# Altium PCB AudioAmplifierBasic.PcbDoc (part 1 of 2)
Units mm, origin at the board's own origin, x right, y up, seen from the top; angles counter-clockwise.
Board outline 125.22 x 154.05 mm, 2 copper layers (Top Layer, Bottom Layer); 45 components, 34 nets, 123 pads, 11 vias.
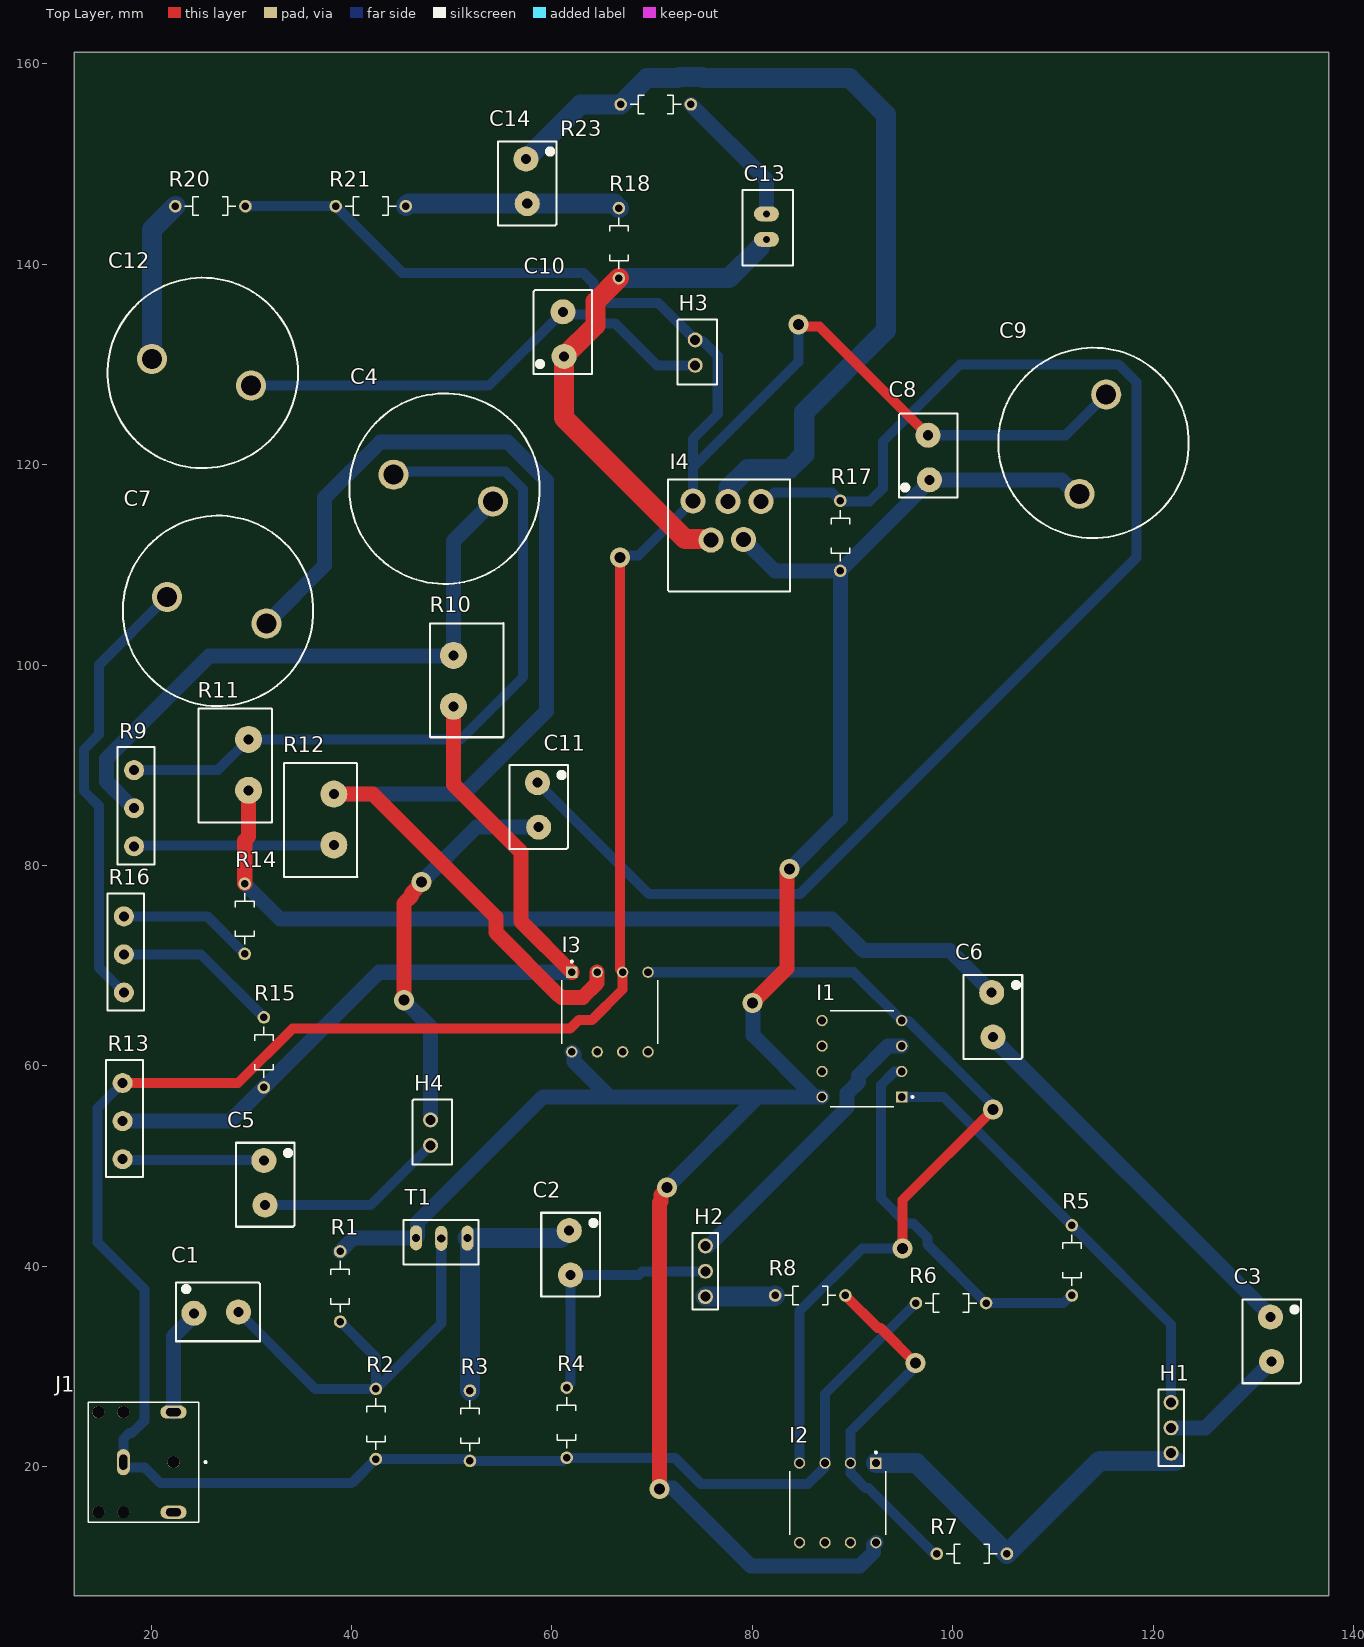
[diagram p0: Top Layer view]
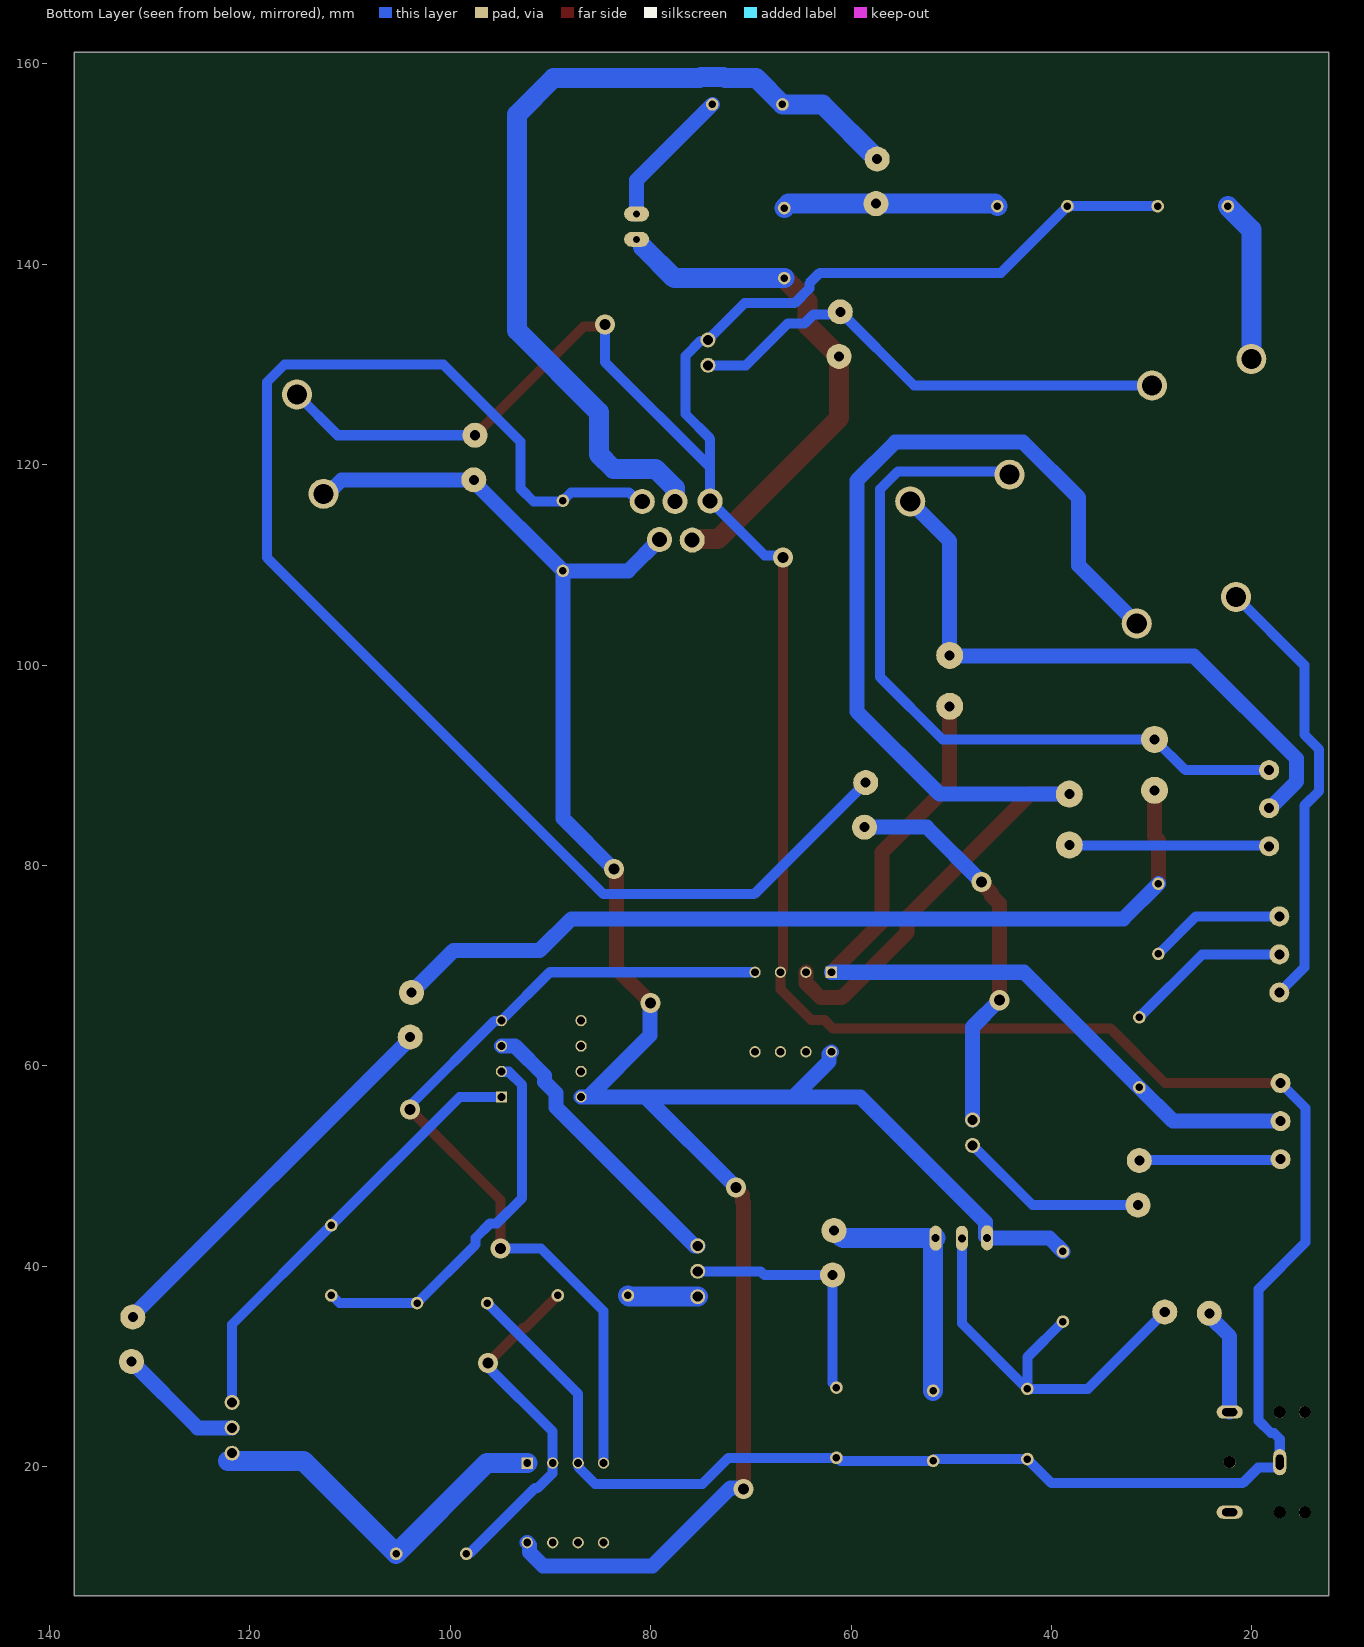
[diagram p1: Bottom Layer view, seen from below]
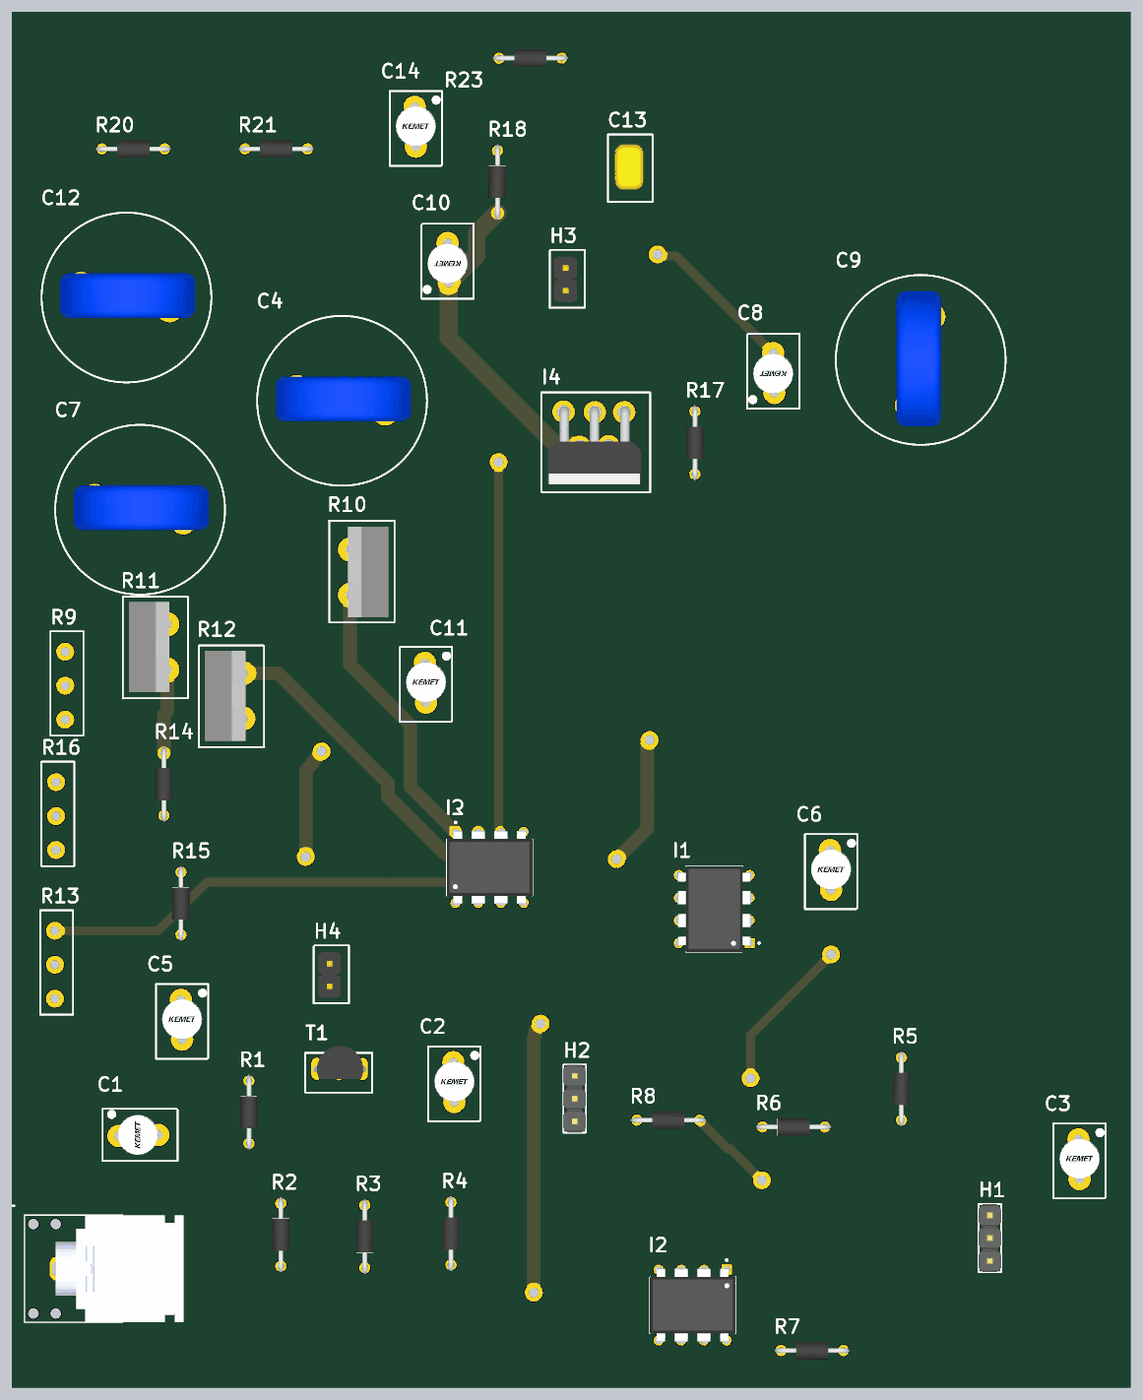
[diagram p2: 3D render of the assembled board from above, using the file's embedded part models]

## Layer stack, top to bottom
Top Solder: solder mask 0.0102, Solder Resist, Dk 3.5
Top Layer: signal copper 0.0356
Dielectric 1: dielectric 0.32, FR-4, Dk 4.8
Bottom Layer: signal copper 0.0356
Bottom Solder: solder mask 0.0102, Solder Resist, Dk 3.5

## Board outline
12.319,7.112 137.541,7.112 137.541,161.163 12.319,161.163

## Design rules (kind name [scope] priority, off if disabled: settings)
Clearance [All] p1: gap=0.5 ignorepadtopadclearanceinfootprint=FALSE
PolygonConnect [All] p1: connectstyle=Relief reliefconductorwidth=0.254 reliefentries=4 polygonreliefangle="90 Angle" airgapwidth=0.254
RoutingVias [All] p1: holewidth=1.1 width=2 viastyle="Through Hole" minholewidth=1 minwidth=1.5 maxholewidth=1.2 maxwidth=2
SolderMaskExpansion [All] p1: expansion=0.102 istentingtop=FALSE
SupplyNets "Schematic Supply Nets_2" [InNet('+15')] p1: voltage=0.000
SupplyNets "Schematic Supply Nets_1" [InNet('GND')] p2: voltage=0.000
SupplyNets "Schematic Supply Nets" [InNet('-15')] p3: voltage=0.000
Width [All] p1: maxlimit=2 minlimit=0.8 preferedwidth=1
30 further rules are at their usual default settings.

## Classes and differential pairs
component class U_ToneController: C4 C5 C6 C7 I3 R9 R10 R11 R12 R13 R14 R15 R16
component class U_PreAmplifierVoltageA: C3 H1 H2 I1 I2 R5 R6 R7 R8
component class U_PreAmplifierBuffer: C1 C2 J1 R1 R2 R3 R4 T1
component class U_PowerAmplifier: C8 C9 C10 C11 C12 C13 C14 H3 H4 I4 R17 R18 R20 R21 R23

## Components (designator, comment, footprint, x,y, rotation, side; value= is the part's Value field where it differs from the comment)
C1 "10uf  25v" CAPASITOR 25.781,26.67 r90 top value=10uF
C2 "10uf  25v" CAPASITOR 53.086,42.037 r0 top value=10uF
C3 "2.2uf" CAPASITOR 123.063,33.401 r0 top
C4 "6.8nf" "CERAMIC CAPACITOR" 49.276,117.602 r0 top
C5 "2.2uf" CAPASITOR 22.606,49.022 r0 top
C6 "2.2uf" CAPASITOR 95.25,65.786 r0 top
C7 "3.3nf" "CERAMIC CAPACITOR" 26.67,105.41 r0 top
C8 "100uf" CAPASITOR 106.299,120.015 r180 top value=100uF
C9 "100nf" "CERAMIC CAPACITOR" 114.046,122.174 r90 top
C10 "1000nf" CAPASITOR 69.85,132.334 r180 top value=1mF
C11 "2.2uf" CAPASITOR 49.911,86.741 r0 top
C12 "100nf" "CERAMIC CAPACITOR" 25.146,129.159 r0 top
C13 "39nf" "CERAMIC CAPACITOR 2" 81.534,145.288 r270 top
C14 "470uf" CAPASITOR 48.768,148.971 r0 top value=470uF
H1 "3 pin male header" "3 PIN MALE HEADER" 121.793,26.416 r0 top
H2 "3 pin male header" "3 PIN MALE HEADER" 75.311,42.037 r0 top
H3 "2 pin Male header" "2PIN MALE HEDER" 74.295,132.461 r0 top
H4 "2 pin Male header" "2PIN MALE HEDER" 47.879,54.61 r0 top
I1 "NE5532P" NE5532P#1 90.932,60.706 r180 top
I2 "NE5532P" NE5532P#1 88.519,16.383 r270 top
I3 "NE5532P" NE5532P#2 65.786,65.372 r270 top
I4 "TDA2003A" TDA2003AV 77.535,114.339 r270 top
J1 "audio jack" AUDIJACK 17.225,20.447 r270 top
R1 "56Kohm" RESISTOR 38.862,37.973 r90 top value=56kR
R2 "47Kohm" RESISTOR 42.418,24.257 r90 top value=47kR
R3 "220ohm" RESISTOR 51.816,24.074 r90 top
R4 "68kohm" RESISTOR 61.468,24.384 r90 top value=68kR
R5 "15kohm" RESISTOR 111.887,40.584 r90 top value=15kR
R6 "1kohm" RESISTOR 99.822,36.322 r0 top value=1kR
R7 "15kohm" RESISTOR 101.91,11.303 r0 top value=15kR
R8 "1kohm" RESISTOR 85.781,37.084 r180 top value=1kR
R9 "100k potenti" "POTENTIOMETER - DUPLICATE" 18.288,89.515 r0 top value=100kR
R10 "10kohm" 10KOHM 52.324,101.346 r0 top
R11 "10kohm" 10KOHM 27.559,87.122 r180 top
R12 "10kohm" 10KOHM 36.068,81.661 r180 top
R13 "100k potenti" "POTENTIOMETER - DUPLICATE" 17.145,58.283 r0 top value=100kR
R14 "4.7kohm" RESISTOR 29.337,74.676 r270 top value=4.7kR
R15 "4.7kohm" RESISTOR 31.242,61.341 r270 top value=4.7kR
R16 "100k potenti" "POTENTIOMETER - DUPLICATE" 17.272,74.92 r0 top value=100kR
R17 "1megaohm" RESISTOR 88.773,112.903 r270 top value=1MR
R18 "220ohm" RESISTOR 66.675,142.113 r270 top
R20 "1kohm" RESISTOR 25.908,145.796 r180 top value=1kR
R21 "2.2kohm" RESISTOR 41.91,145.796 r0 top value=2.2kR
R23 "39ohm" RESISTOR 70.358,155.956 r0 top value=39R
T1 "C828" TRANSISTOR 48.848,42.581 r90 top

## Footprints (in the part's own frame and the unit in brackets; to place one, negate y for a bottom-side part, rotate by r counter-clockwise, add the part's x,y. Pads: shape width x height; smd on the part's side, far side on the other; paste and mask are expansions set on the pad)
"2PIN MALE HEDER" [mm]
  round 1.5 hole 1 paste-2539.97: 1(0,0) 2(0,-2.54)
  silkscreen extent -1.78,-4.44 2.16,2.03, body extent -1.28,-3.81 1.26,1.27, height 8.55
"3 PIN MALE HEADER" [mm]
  round 1.5 hole 1: 1(0,0) 2(0,-2.54) 3(0,-5.08)
  silkscreen extent -1.27,-6.35 1.27,1.27, body extent -1.27,-6.35 1.27,1.27, height 8.65
10KOHM [mm]
  round 2.7 hole 1: 1(-2.159,-0.381) 2(-2.159,-5.461)
  silkscreen extent -4.51,-8.55 2.82,2.83, body extent -2.39,-7.98 2.16,2.13, height 13.79
AUDIJACK [mm]
  oval 2.616x1.308 hole 0.8 slot 1.5 at 0 deg: 1(0,0)
  oval 1.308x2.616 hole 0.8 slot 1.5 at 90 deg: 2(5,5) 3(-5,5)
  round 1.2 hole 1.2 unplated: ""(-5,0) ""(-5,-2.5) ""(0,5) ""(5,0) ""(5,-2.5)
  silkscreen extent -6,-3.5 6,8.3, body extent -6,0 6,14.3, height 3.01
CAPASITOR [mm]
  round 2.5 hole 1: 1(8.763,-2.921) 2(8.636,1.524)
  silkscreen extent 5.84,-5.08 11.68,3.3, body extent 6.51,-2.89 11.02,1.62, height 10.04
"CERAMIC CAPACITOR" [mm]
  round 3 hole 2: 1(-5.08,1.397) 2(4.826,-1.27)
  silkscreen extent -9.5,-9.5 9.5,9.5, body extent -7.42,-2.29 7.68,2.72, height 16.6
"CERAMIC CAPACITOR 2" [mm]
  oval 1.5x2.5 hole 0.7: 1(0.254,-0.127) 2(2.794,-0.127)
  silkscreen extent -2.12,-2.5 5.42,2.5, body extent -1.02,-1.72 4.06,1.46, height 9.35
NE5532P#1 [mm]
  rect 1.13x1.13 / inner round 1.13 / far side rect 1.13x1.13 hole 0.78: 1(-3.97,3.81)
  round 1.13 hole 0.78: 2(-3.97,1.27) 3(-3.97,-1.27) 4(-3.97,-3.81) 5(3.97,-3.81) 6(3.97,-1.27) 7(3.97,1.27) 8(3.97,3.81)
  silkscreen extent -5.13,-4.79 3.18,4.79, body extent -4.1,-4.79 4.1,4.79, height 5.08
NE5532P#2 [mm]
  rect 1.13x1.13 / inner round 1.13 / far side rect 1.13x1.13 hole 0.78: 1(-3.97,-3.81)
  round 1.13 hole 0.78: 2(-3.97,-1.27) 3(-3.97,1.27) 4(-3.97,3.81) 5(3.97,3.81) 6(3.97,1.27) 7(3.97,-1.27) 8(3.97,-3.81)
  silkscreen extent -5.13,-4.79 3.18,4.79, body extent -4.1,-4.79 4.1,4.79, height 5.08
"POTENTIOMETER - DUPLICATE" [mm]
  round 2 hole 1: 1(0,0) 2(0,-3.8) 3(0,-7.6)
  silkscreen extent -1.65,-9.4 2.03,2.29, body extent -1.68,-9.4 2.16,2.32, height 1.73
RESISTOR [mm]
  round 1.258 hole 0.75: 1(-3.5,0) 2(3.5,0)
  silkscreen extent -2.55,-0.92 2.55,0.92, body extent -4.2,-1 4.2,1, height 2.01
TDA2003AV [mm]
  round 2.5 hole 1.5: 1(-1.982,3.317) 2(-1.983,0.036) 3(-2.035,-3.462) 4(1.872,-1.672) 5(1.817,1.586)
  silkscreen extent -4.19,-5.97 6.99,6.22, body extent -2.62,-5.21 6.1,5.21, height 19.52
TRANSISTOR [mm]
  oval 2.5x1.2 hole 0.8: 1(0.254,2.413) 2(0.207,-0.101) 3(0.218,-2.714)
  silkscreen extent -2.41,-3.81 2.03,3.68, body extent -0.88,-3.09 2.79,2.67, height 10.17

## Part data
C1 C2: library part 25ZLG10MEFC4X7, "Aluminum Electrolytic Capacitor, Polarized, Aluminum (wet), 25V, 20% +Tol, 20% -Tol, 10uF, Through Hole Mount", Capacitor Type=Aluminium, Leakage Current=7.5uA, Manufacturer=Rubycon, Max Operating Temperature=105°C, Min Operating Temperature=-40°C, Package Shape=Cylindrical, Package Style=RadialMeter, Rated DC Voltage (URdc)=25V, Ripple Current=55.2mA, Supplier Part Number=1281813, Tolerance  (fill in as +-)=20%, Category="Aluminum Electrolytic Capacitors", ComponentLink1Description=https://datasheet.ciiva.com:443/pdfs/VipMasterIC/IC/RUBY/RUBY-S-A0008141769/RUBY-S-A0008141769-1.pdf?src-supplier=IHS+Markit, ComponentLink1URL=https://datasheet.ciiva.com:443/pdfs/VipMasterIC/IC/RUBY/RUBY-S-A0008141769/RUBY-S-A0008141769-1.pdf?src-supplier=IHS+Markit, ComponentLink2Description=https://datasheet.ciiva.com/6309/e-zlg-6309557.pdf?src-supplier=Digikey, ComponentLink2URL=https://datasheet.ciiva.com/6309/e-zlg-6309557.pdf?src-supplier=Digikey, ComponentLink3Description=https://datasheet.ciiva.com/11691/e-zlg-11691071.pdf?src-supplier=Avnet, ComponentLink3URL=https://datasheet.ciiva.com/11691/e-zlg-11691071.pdf?src-supplier=Avnet, ComponentLink4Description=https://datasheet.ciiva.com/1455/48838-1455972.pdf?src-supplier=Element14, ComponentLink4URL=https://datasheet.ciiva.com/1455/48838-1455972.pdf?src-supplier=Element14, Diameter=4mm, Dielectric Material=Aluminium, Length=7mm, Manufacturer Part Number=25ZLG10MEFC4X7, Mounting Technology="Through Hole", Packaging=Bulk, Pins=2, Polarity=Polarized, Pricing="10=0.161, 100=0.0857, 500=0.084 (GBP)", Reach SVHC Compliant=Yes, RoHS=Yes, RoHS Compliant=Yes, Supplier=Farnell, Tan Delta=0.14, Terminal Pitch=1.5mm, Termination=Wire, Tolerance (fill in as +-)=20%
C3 C5 C6 C11: library part 400LLE2R2MEFC8X11.5, "Aluminum Electrolytic Capacitor, Polarized, Aluminum (wet), 400V, 20% +Tol, 20% -Tol, 2.2uF, Through Hole Mount", Manufacturer=Rubycon, Supplier Part Number=1189-1329-ND, Category="Aluminum Electrolytic Capacitors", ComponentLink1Description=https://datasheet.ciiva.com:443/pdfs/VipMasterIC/IC/RUBY/RUBYS01654/RUBYS01654-1.pdf?src-supplier=IHS+Markit, ComponentLink1URL=https://datasheet.ciiva.com:443/pdfs/VipMasterIC/IC/RUBY/RUBYS01654/RUBYS01654-1.pdf?src-supplier=IHS+Markit, ComponentLink2Description=https://datasheet.ciiva.com/29544/e-lle-29544381.pdf?src-supplier=Digikey, ComponentLink2URL=https://datasheet.ciiva.com/29544/e-lle-29544381.pdf?src-supplier=Digikey, Manufacturer Part Number=400LLE2R2MEFC8X11.5, Pricing="1=0.53, 10=0.326, 50=0.2416, 100=0.2148, 500=0.16848, 2000=0.14171, 4000=0.1316, 6000=0.1265 (USD)", RoHS=Yes, Stock=36469, Supplier=Digikey
C4: library part C781U682MZVDAAWL25, "C700KJY SFTY X1-440 Y2-300, Ceramic, 6800 pF, 20%, 440 VAC (X1), 300 VAC (Y2), Y5V, Lead Spacing = 10mm", Manufacturer=KEMET, Supplier Part Number=80-C781U682MZVDAWL25, ComponentLink1Description=https://datasheet.octopart.com/C781U682MZVDAAWL25-KEMET-datasheet-181955793.pdf?src-supplier=Farnell, ComponentLink1URL=https://datasheet.octopart.com/C781U682MZVDAAWL25-KEMET-datasheet-181955793.pdf?src-supplier=Farnell, Manufacturer Part Number=C781U682MZVDAAWL25, Pricing="1=2.61, 10=2.11, 50=2.11, 100=1.96, 1000=1.34, 10000=1.29 (USD)", Stock=168, Supplier=Mouser
C7: library part C731U332MZVDBA7317, Manufacturer=KEMET, Supplier Part Number=399-C731U332MZVDBA7317CT-ND, Manufacturer Part Number=C731U332MZVDBA7317, Pricing="1=1.17, 10=0.757, 100=0.5449 (USD)", RoHS=No, Stock=4998, Supplier=Digikey
C8: library part 35ZLH100MEFC6.3X11, "Aluminum Electrolytic Capacitor, Polarized, Aluminum (wet), 35V, 20% +Tol, 20% -Tol, 100uF, Through Hole Mount", Capacitor Type=Aluminium, Manufacturer=Rubycon, Manufacturer Series=ZLH, Max Operating Temperature=105°C, Min Operating Temperature=-40°C, Package Style=RadialMeter, Rated DC Voltage (URdc)=35V, Ripple Current=540mA, Supplier Part Number=1189-1300-ND, Tolerance  (fill in as +-)=20%, Category="Aluminum Electrolytic Capacitors", ComponentLink1Description=https://datasheet.ciiva.com:443/pdfs/VipMasterIC/IC/RUBY/RUBYS01453/RUBYS01453-1.pdf?src-supplier=IHS+Markit, ComponentLink1URL=https://datasheet.ciiva.com:443/pdfs/VipMasterIC/IC/RUBY/RUBYS01453/RUBYS01453-1.pdf?src-supplier=IHS+Markit, ComponentLink2Description=https://datasheet.ciiva.com/11782/0900766b80e2f602-11782304.pdf?src-supplier=Rs, ComponentLink2URL=https://datasheet.ciiva.com/11782/0900766b80e2f602-11782304.pdf?src-supplier=Rs, ComponentLink3Description=https://datasheet.ciiva.com/11690/e-zlh-11690956.pdf?src-supplier=Avnet, ComponentLink3URL=https://datasheet.ciiva.com/11690/e-zlh-11690956.pdf?src-supplier=Avnet, ComponentLink4Description=https://datasheet.ciiva.com/1456/e-zlh-1456215.pdf?src-supplier=Element14, ComponentLink4URL=https://datasheet.ciiva.com/1456/e-zlh-1456215.pdf?src-supplier=Element14, ComponentLink5Description=https://datasheet.ciiva.com/5713/e-zlh-5713612.pdf?src-supplier=Farnell, ComponentLink5URL=https://datasheet.ciiva.com/5713/e-zlh-5713612.pdf?src-supplier=Farnell, ComponentLink6Description=https://datasheet.ciiva.com/6311/e-zlh-6311224.pdf?src-supplier=Digikey, ComponentLink6URL=https://datasheet.ciiva.com/6311/e-zlh-6311224.pdf?src-supplier=Digikey, Diameter=6.3mm, Dielectric Material=Aluminium, Length=11mm, Manufacturer Part Number=35ZLH100MEFC6.3X11, Packaging=Bulk, Pins=2, Polarity=Polarized, Pricing="1=0.31, 10=0.187, 50=0.1362, 100=0.1201, 500=0.09204, 2000=0.07579, 4000=0.06965, 6000=0.06655 (USD)", Reach SVHC Compliant=Yes, RoHS=Yes, RoHS Compliant=Yes, Stock=13897, Supplier=Digikey, Terminal Pitch=2.5mm, Tolerance (fill in as +-)=20%
C9 C12: library part K104K20X7RK53H5G, Manufacturer="Vishay BCcomponents", Supplier Part Number=56-K104K20X7RK53H5G-ND, Category="Ceramic Capacitors", Manufacturer Part Number=K104K20X7RK53H5G, Pricing="1=0.87, 10=0.559, 100=0.4058, 1000=0.31705, 3000=0.29613 (USD)", RoHS=No, Stock=17432, Supplier=Digikey
C10: library part 10ZLH1000MEFC10X12.5, "Aluminum Electrolytic Capacitor, Polarized, Aluminum (wet), 10V, 20% +Tol, 20% -Tol, 1000uF, Through Hole Mount", Capacitor Type=Aluminium, Manufacturer=Rubycon, Max Operating Temperature=105°C, Min Operating Temperature=-40°C, Package Style=RadialMeter, Rated DC Voltage (URdc)=10V, Ripple Current=1.33A, Supplier Part Number=1189-1072-ND, Tolerance  (fill in as +-)=20%, Category="Aluminum Electrolytic Capacitors", ComponentLink1Description=https://datasheet.ciiva.com:443/pdfs/VipMasterIC/IC/RUBY/RUBYS01453/RUBYS01453-1.pdf?src-supplier=IHS+Markit, ComponentLink1URL=https://datasheet.ciiva.com:443/pdfs/VipMasterIC/IC/RUBY/RUBYS01453/RUBYS01453-1.pdf?src-supplier=IHS+Markit, ComponentLink2Description=https://datasheet.ciiva.com/11779/0900766b80e2f602-11779591.pdf?src-supplier=Rs, ComponentLink2URL=https://datasheet.ciiva.com/11779/0900766b80e2f602-11779591.pdf?src-supplier=Rs, ComponentLink3Description=https://datasheet.ciiva.com/6316/e-zlh-6316685.pdf?src-supplier=Digikey, ComponentLink3URL=https://datasheet.ciiva.com/6316/e-zlh-6316685.pdf?src-supplier=Digikey, ComponentLink4Description=https://datasheet.ciiva.com/11690/e-zlh-11690747.pdf?src-supplier=Avnet, ComponentLink4URL=https://datasheet.ciiva.com/11690/e-zlh-11690747.pdf?src-supplier=Avnet, ComponentLink5Description=https://datasheet.ciiva.com/22732/1910927-22732378.pdf?src-supplier=Element14, ComponentLink5URL=https://datasheet.ciiva.com/22732/1910927-22732378.pdf?src-supplier=Element14, Diameter=10mm, Dielectric Material=Aluminium, Length=12.5mm, Manufacturer Part Number=10ZLH1000MEFC10X12.5, Packaging=Bulk, Pins=2, Polarity=Polarized, Pricing="1=0.51, 10=0.318, 50=0.2356, 100=0.2095, 500=0.16416, 1000=0.14984, 3000=0.13193, 5000=0.12524 (USD)", Reach SVHC Compliant=Yes, RoHS=Yes, RoHS Compliant=Yes, Stock=171118, Supplier=Digikey, Terminal Pitch=5mm, Tolerance (fill in as +-)=20%
C13: library part C320C393K3G5TA, Manufacturer=KEMET, Supplier Part Number=C320C393K3G5TA-ND, Category="Ceramic Capacitors", Manufacturer Part Number=C320C393K3G5TA, Pricing="1500=0.15707 (USD)", RoHS=No, Supplier=Digikey
C14: library part 16ZLJ470MTA8X11.5, "Aluminum Electrolytic Capacitor, Polarized, Aluminum (wet), 16V, 20% +Tol, 20% -Tol, 470uF", Capacitor Type=Aluminium, Manufacturer=Rubycon, Max Operating Temperature=105°C, Min Operating Temperature=-40°C, Package Style=RadialMeter, Rated DC Voltage (URdc)=16V, Ripple Current=1.2A, Supplier Part Number=1189-1549-1-ND, Tolerance  (fill in as +-)=20%, Category="Aluminum Electrolytic Capacitors", ComponentLink1Description=https://datasheet.ciiva.com:443/pdfs/VipMasterIC/IC/RUBY/RUBYS01454/RUBYS01454-1.pdf?src-supplier=IHS+Markit, ComponentLink1URL=https://datasheet.ciiva.com:443/pdfs/VipMasterIC/IC/RUBY/RUBYS01454/RUBYS01454-1.pdf?src-supplier=IHS+Markit, ComponentLink2Description=https://datasheet.ciiva.com/22732/1725816-22732487.pdf?src-supplier=Element14, ComponentLink2URL=https://datasheet.ciiva.com/22732/1725816-22732487.pdf?src-supplier=Element14, ComponentLink3Description=https://datasheet.ciiva.com/6300/e-zlj-6300999.pdf?src-supplier=Digikey, ComponentLink3URL=https://datasheet.ciiva.com/6300/e-zlj-6300999.pdf?src-supplier=Digikey, ComponentLink4Description=https://datasheet.ciiva.com/6301/e-zlj-6301065.pdf?src-supplier=Digikey, ComponentLink4URL=https://datasheet.ciiva.com/6301/e-zlj-6301065.pdf?src-supplier=Digikey, Diameter=8mm, Dielectric Material=Aluminium, Length=11.5mm, Manufacturer Part Number=16ZLJ470MTA8X11.5, Packaging="Tape and Reel", Pins=2, Polarity=Polarized, Pricing="1=0.49, 10=0.305, 50=0.2254, 100=0.2001, 500=0.15654 (USD)", Reach SVHC Compliant=Yes, RoHS=Yes, RoHS Compliant=Yes, Stock=34781, Supplier=Digikey, Terminal Pitch=5mm, Tolerance (fill in as +-)=20%
H1 H2: library part M20-9990345, "Board Connector, 3 Contact(s), 1 Row(s), Male, Straight, 0.1 inch Pitch, Solder Terminal, Locking, Black Insulator", Contact Resistance=25mR, Dielectric Withstanding Voltage (AC)=750V, Flammability Rating="UL94 V-0", Insulation Color=Black, Insulation Resistance=1GR, Manufacturer=Harwin, Max Operating Temperature=105°C, Min Operating Temperature=-40°C, Rated Current (Signal)=3A, Supplier Part Number=952-2263-ND, Additional Feature="ROHS COMPLIANT", Body Breadth=0.1inch, Body Depth=0.1inch, Body Length=0.3inch, Body/Shell Style=RECEPTACLE, Category="Headers and Wire Housings", ComponentLink1Description=https://datasheet.ciiva.com:443/pdfs/VipMasterIC/IC/HRWN/HRWN-S-A0003033920/HRWN-S-A0003397280-1.pdf?src-supplier=IHS+Markit, ComponentLink1URL=https://datasheet.ciiva.com:443/pdfs/VipMasterIC/IC/HRWN/HRWN-S-A0003033920/HRWN-S-A0003397280-1.pdf?src-supplier=IHS+Markit, ComponentLink2Description=https://datasheet.ciiva.com/11747/0900766b80da602d-11747505.pdf?src-supplier=Rs, ComponentLink2URL=https://datasheet.ciiva.com/11747/0900766b80da602d-11747505.pdf?src-supplier=Rs, ComponentLink3Description=https://datasheet.ciiva.com/5160/m20-999-351179-5160492.pdf?src-supplier=Mouser, ComponentLink3URL=https://datasheet.ciiva.com/5160/m20-999-351179-5160492.pdf?src-supplier=Mouser, ComponentLink4Description=https://datasheet.ciiva.com/10151/m20-999-10151334.pdf?src-supplier=Avnet, ComponentLink4URL=https://datasheet.ciiva.com/10151/m20-999-10151334.pdf?src-supplier=Avnet, Connector Type="BOARD CONNECTOR", Contact Finish - Mating=GOLD, Contact Finish - Termination="Gold (Au) - with Nickel (Ni) barrier", Contact Gender=Male, Contact Material=Brass, Contact Pattern=RECTANGULAR, DIN Conformance=No, Durability=300Cycles, Filter Feature=No, IEC Conformance=No, Insulation Material=Nylon, JESD-609 Code=e4, Manufacturer Part Number=M20-9990345, Mating Contact Pitch=0.1inch, MIL Conformance=No, Mixed Contacts=No, Mounting Option 1=LOCKING, Mounting Style=STRAIGHT, Mounting Technology=Board, Number Of Connectors=1, Number of Contacts=3, Number Of PCB Rows=1, Number of Rows Loaded=1, Option="General Purpose", Pricing="1=0.15, 10=0.124, 100=0.1053, 500=0.09398, 1000=0.08949, 5000=0.07987, 10000=0.07606 (USD)", Reach SVHC Compliant=Yes, Reference Standard=UL, Reliability=COMMERCIAL, RoHS=Yes, RoHS Compliant=Yes, Stock=57860, Supplier=Digikey, Terminal Length=0.118inch, Terminal Pitch=2.54mm, Termination=Solder
H3 H4: library part 61300211121, "Board Connector, 2 Contact(s), 1 Row(s), Male, Straight, 0.1 inch Pitch, Solder Terminal, Locking, Black Insulator, Plug", Contact Resistance=20mR, Dielectric Withstanding Voltage (AC)=500V, Flammability Rating="UL94 V-0", Insulation Color=Black, Insulation Resistance=1GR, Manufacturer="Wurth Electronics", Max Operating Temperature=125°C, Min Operating Temperature=-40°C, Rated Current (Signal)=3A, Supplier Part Number=732-5315-ND, Body Breadth=0.1inch, Body Depth=0.1inch, Body Length=0.2inch, Body/Shell Style=PLUG, Category="Headers and Wire Housings", ComponentLink1Description=https://datasheet.ciiva.com:443/pdfs/VipMasterIC/IC/MIDC/MIDCS07676/MIDCS07676-1.pdf?src-supplier=IHS+Markit, ComponentLink1URL=https://datasheet.ciiva.com:443/pdfs/VipMasterIC/IC/MIDC/MIDCS07676/MIDCS07676-1.pdf?src-supplier=IHS+Markit, ComponentLink2Description=https://datasheet.ciiva.com/13619/6130xx11121-48870-13619345.pdf?src-supplier=Mouser, ComponentLink2URL=https://datasheet.ciiva.com/13619/6130xx11121-48870-13619345.pdf?src-supplier=Mouser, Connector Type="BOARD CONNECTOR", Contact Finish - Mating=GOLD, Contact Finish - Termination="Gold (Au) - with Nickel (Ni) barrier", Contact Gender=Male, Contact Material="Copper Alloy", Contact Pattern=RECTANGULAR, Contact Style="SQ PIN-SKT", DIN Conformance=No, Filter Feature=No, IEC Conformance=No, Insulation Material=Polybutylene, JESD-609 Code=e4, Manufacturer Part Number=61300211121, Mating Contact Pitch=0.1inch, MIL Conformance=No, Mixed Contacts=No, Mounting Option 1=LOCKING, Mounting Style=STRAIGHT, Mounting Technology=Board, Number Of Connectors=1, Number of Contacts=2, Number of Rows Loaded=1, Option="General Purpose", PCB Contact Pattern=RECTANGULAR, Pricing="1=0.12, 10=0.102, 25=0.0848, 50=0.0712, 100=0.0639, 1000=0.06 (USD)", Reach SVHC Compliant=Yes, Reference Standard=UL, Reliability=COMMERCIAL, RoHS=Yes, RoHS Compliant=Yes, Stock=123899, Supplier=Digikey, Terminal Length=0.118inch, Terminal Pitch=2.54mm, Termination=Solder
I1 I2 I3: "Operational Amplifier, 2 Func, 5000uV Offset-Max, BIPolar, PDIP8", Average Bias Current-Max (IIB)=1uA, Bias Current-Max (IIB) @25C=800nA, Case/Package=DIP, Frequency Compensation=YES, Input Offset Voltage-Max=5mV, Manufacturer="Texas Instruments", Max Operating Temperature=70°C, Max Supply Current=16mA, Min Operating Temperature=0°C, Neg Supply Voltage Limit-Max=-22V, Neg Supply Voltage-Nom (Vsup)=-15V, Nominal Supply Voltage=15V, Package Body Material=Plastic, Package Equivalence Code=DIP8,.3, Package Shape=Rectangular, Package Style=IN-LINEMeter, Power Supplies=+-5/+-15/10/30V, Supplier Part Number=595-NE5532P, Supply Voltage Limit-Max=22V, Temperature Grade=COMMERCIAL, Voltage Gain-Min=10000, Amplifier Type="OPERATIONAL AMPLIFIER", Architecture=VOLTAGE-FEEDBACK, Category="Amplifiers - Op Amps, Buffer, Instrumentation", Channels=2, Common Mode Rejection Ratio-Min=70dB, Common-mode Reject Ratio-Nom=100dB, ComponentLink1Description=https://www.ti.com:443/lit/ds/symlink/ne5532.pdf?src-supplier=IHS+Markit, ComponentLink1URL=https://www.ti.com:443/lit/ds/symlink/ne5532.pdf?src-supplier=IHS+Markit, ComponentLink2Description=https://datasheet.ciiva.com/14151/jyne5532-e-14151126.pdf?src-supplier=Distrelec, ComponentLink2URL=https://datasheet.ciiva.com/14151/jyne5532-e-14151126.pdf?src-supplier=Distrelec, ComponentLink3Description=https://datasheet.ciiva.com/27050/903963-27050795.pdf?src-supplier=Jameco, ComponentLink3URL=https://datasheet.ciiva.com/27050/903963-27050795.pdf?src-supplier=Jameco, ComponentLink4Description=https://datasheet.ciiva.com/15129/getdatasheetpartid-41254-15129711.pdf?src-supplier=Verical, ComponentLink4URL=https://datasheet.ciiva.com/15129/getdatasheetpartid-41254-15129711.pdf?src-supplier=Verical, ComponentLink5Description=https://datasheet.ciiva.com/26325/151768-da-01-en-ne-5532p-26325914.pdf?src-supplier=Conrad, ComponentLink5URL=https://datasheet.ciiva.com/26325/151768-da-01-en-ne-5532p-26325914.pdf?src-supplier=Conrad, ComponentLink6Description=https://datasheet.ciiva.com/1803/ne5532-1803186.pdf?src-supplier=Digikey, ComponentLink6URL=https://datasheet.ciiva.com/1803/ne5532-1803186.pdf?src-supplier=Digikey, ComponentLink7Description=https://datasheet.ciiva.com/2973/sa5532a-2973704.pdf?src-supplier=Avnet, ComponentLink7URL=https://datasheet.ciiva.com/2973/sa5532a-2973704.pdf?src-supplier=Avnet, Height - Seated (Max)=5.08mm, JESD-30 Code=R-PDIP-T8, JESD-609 Code=e3, Length=9.81mm, Low-Offset=No, Manufacturer Part Number=NE5532P, Packaging=Rail/Tube, Pins=8, Pricing="1=0.57, 10=0.402, 50=0.335, 100=0.313, 1000=0.266, 10000=0.254 (USD)", Qualification Status="Not Qualified", Reach SVHC Compliant=Yes, RoHS=Yes, RoHS Compliant=Yes, Slew Rate=9V/µs, Stock=14297, Supplier=Mouser, Surface Mount=No, Technology=BIPOLAR, Terminal Finish=Tin, Terminal Form="Through Hole", Terminal Pitch=2.54mm, Terminal Position=DUAL, Unity Gain BW-Nom=10MHz, Width=7.62mm
I4: library part TDA2003AV, "Audio Amplifier, 12W, 1 Channel(s), 1 Func, Bipolar", Case/Package=ZIP, Manufacturer=STMicroelectronics, Output Power-Nom=12W, Package Shape=Rectangular, Power Supplies=14.4V, Supplier Part Number=2067880, Bandwidth-Nom=15MHz, Category="Amplifiers - Audio", Channels=1, ComponentLink1Description=https://datasheet.ciiva.com:443/pdfs/VipMasterIC/IC/SGST/SGSTS34642/SGSTS34847-1.pdf?src-supplier=IHS+Markit, ComponentLink1URL=https://datasheet.ciiva.com:443/pdfs/VipMasterIC/IC/SGST/SGSTS34642/SGSTS34847-1.pdf?src-supplier=IHS+Markit, ComponentLink2Description=https://datasheet.ciiva.com/4767/dm00028077-100155-4767180.pdf?src-supplier=Mouser, ComponentLink2URL=https://datasheet.ciiva.com/4767/dm00028077-100155-4767180.pdf?src-supplier=Mouser, ComponentLink3Description=https://datasheet.ciiva.com/19463/2183867-19463360.pdf?src-supplier=Jameco, ComponentLink3URL=https://datasheet.ciiva.com/19463/2183867-19463360.pdf?src-supplier=Jameco, ComponentLink4Description=https://datasheet.ciiva.com/15131/getdatasheetpartid-365868-15131921.pdf?src-supplier=Verical, ComponentLink4URL=https://datasheet.ciiva.com/15131/getdatasheetpartid-365868-15131921.pdf?src-supplier=Verical, ComponentLink5Description=https://datasheet.ciiva.com/1481/1690488-1481698.pdf?src-supplier=Element14, ComponentLink5URL=https://datasheet.ciiva.com/1481/1690488-1481698.pdf?src-supplier=Element14, ComponentLink6Description=https://datasheet.ciiva.com/16493/dm00028077-16493721.pdf?src-supplier=Future+Electronics, ComponentLink6URL=https://datasheet.ciiva.com/16493/dm00028077-16493721.pdf?src-supplier=Future+Electronics, ComponentLink7Description=https://datasheet.ciiva.com/1790/dm00028077-1790102.pdf?src-supplier=Digikey, ComponentLink7URL=https://datasheet.ciiva.com/1790/dm00028077-1790102.pdf?src-supplier=Digikey, Consumer IC Type="AUDIO AMPLIFIER", Gain=40dB, JESD-609 Code=e3, Manufacturer Part Number=TDA2003AV, Number of Channels=1, Pins=5, Pricing="1=0.94, 10=0.83, 100=0.65, 250=0.57, 500=0.5 (GBP)", Qualification Status="Not Qualified", Reach SVHC Compliant=No, RoHS=Yes, RoHS Compliant=Yes, Supplier=Farnell, Surface Mount=No, Technology=BIPOLAR, Terminal Finish=Tin, Terminal Form="Through Hole", Terminal Pitch=1.7mm, Terminal Position=ZIG-ZAG
J1: library part SJ1-3523N, "3 Pole(s), Solder Terminal, Jack", Manufacturer="Same Sky", Supplier Part Number=CP1-3523N-ND, Category="Audio / Video Connectors", ComponentLink1Description=https://datasheet.octopart.com/SJ1-3523N-Same-Sky-datasheet-182050170.pdf?src-supplier=Future+Electronics, ComponentLink1URL=https://datasheet.octopart.com/SJ1-3523N-Same-Sky-datasheet-182050170.pdf?src-supplier=Future+Electronics, ComponentLink2Description=https://datasheet.octopart.com/SJ1-3523N-CUI-datasheet-96929.pdf?src-supplier=Digikey, ComponentLink2URL=https://datasheet.octopart.com/SJ1-3523N-CUI-datasheet-96929.pdf?src-supplier=Digikey, ComponentLink3Description=http://www.cui.com/Product/Resource/FuturePDF/SJ1-352XN_Series.pdf?src-supplier=Future+Electronics, ComponentLink3URL=http://www.cui.com/Product/Resource/FuturePDF/SJ1-352XN_Series.pdf?src-supplier=Future+Electronics, ComponentLink4Description=https://datasheet.octopart.com/SJ1-3523N-CUI-Devices-datasheet-103114031.pdf?src-supplier=Master+Electronics, ComponentLink4URL=https://datasheet.octopart.com/SJ1-3523N-CUI-Devices-datasheet-103114031.pdf?src-supplier=Master+Electronics, ComponentLink5Description=https://datasheet.octopart.com/SJ1-3523N-Same-Sky-datasheet-182881325.pdf?src-supplier=Electro+Sonic, ComponentLink5URL=https://datasheet.octopart.com/SJ1-3523N-Same-Sky-datasheet-182881325.pdf?src-supplier=Electro+Sonic, Manufacturer Part Number=SJ1-3523N, Pricing="1=0.78, 10=0.665, 25=0.6232, 50=0.5936, 140=0.55193, 280=0.52554, 560=0.50043, 1120=0.47653, 2520=0.46125 (USD)", Reach SVHC Compliant=Yes, RoHS=Yes, Stock=300382, Supplier=Digikey
R1: library part CF18JT56K0, "Fixed Resistor, Carbon Film, 0.125W, 56000ohm, 250V, 5% +/-Tol, -500,0ppm/Cel, Through Hole Mount", Manufacturer="Stackpole Electronics", Max Operating Temperature=155°C, Min Operating Temperature=-55°C, Package Length=3.3mm, Package Shape=Tubular, Package Style=AXIAL, Power=125mW, Rated Temperature=70°C, Resistor Type="FIXED RESISTOR", Supplier Part Number=CF18JT56K0CT-ND, Temperature Coefficient (ppm/Cel)=500, Tolerance=5%, Working Voltage=250V, Category="Through-Hole Resistors", ComponentLink1Description=https://datasheet.ciiva.com:443/pdfs/VipMasterIC/IC/SEIE/SEIE-S-A0009883960/SEIE-S-A0009883960-1.pdf?src-supplier=IHS+Markit, ComponentLink1URL=https://datasheet.ciiva.com:443/pdfs/VipMasterIC/IC/SEIE/SEIE-S-A0009883960/SEIE-S-A0009883960-1.pdf?src-supplier=IHS+Markit, ComponentLink2Description=https://www.seielect.com/Catalog/SEI-CF_CFM.pdf?src-supplier=Digikey, ComponentLink2URL=https://www.seielect.com/Catalog/SEI-CF_CFM.pdf?src-supplier=Digikey, ComponentLink3Description=https://www.seielect.com/catalog/SEI-CF_CFM.pdf?src-supplier=Avnet, ComponentLink3URL=https://www.seielect.com/catalog/SEI-CF_CFM.pdf?src-supplier=Avnet, Construction=Tubular, JESD-609 Code=e3, Lead Diameter=0.4mm, Lead Length=28mm, Manufacturer Part Number=CF18JT56K0, Mounting Technology="Through Hole", Packaging="Tape and Reel", Pins=2, Pricing="1=0.1, 10=0.022, 25=0.0188, 50=0.0162, 100=0.0143, 250=0.01204, 500=0.01062, 1000=0.00943 (USD)", Reach SVHC Compliant=Yes, RoHS=Yes, RoHS Compliant=Yes, Stock=85340, Supplier=Digikey, Technology="CARBON FILM", Terminal Finish=Tin, Termination=Wire
R2: library part CF12JT47K0, "Fixed Resistor, Carbon Film, 0.5W, 47000ohm, 350V, 5% +/-Tol, -500,0ppm/Cel, Through Hole Mount", Manufacturer="Stackpole Electronics", Max Operating Temperature=155°C, Min Operating Temperature=-55°C, Package Length=8.5mm, Package Shape=Tubular, Package Style=AXIAL, Power=500mW, Rated Temperature=70°C, Resistor Type="FIXED RESISTOR", Supplier Part Number=CF12JT47K0CT-ND, Temperature Coefficient (ppm/Cel)=500, Tolerance=5%, Working Voltage=350V, Category="Through-Hole Resistors", ComponentLink1Description=https://datasheet.ciiva.com:443/pdfs/VipMasterIC/IC/SEIE/SEIE-S-A0009883960/SEIE-S-A0009883960-1.pdf?src-supplier=IHS+Markit, ComponentLink1URL=https://datasheet.ciiva.com:443/pdfs/VipMasterIC/IC/SEIE/SEIE-S-A0009883960/SEIE-S-A0009883960-1.pdf?src-supplier=IHS+Markit, ComponentLink2Description=http://components.arrow.com/part/dataview/53771568S789882N1174?src-supplier=Arrow+Electronics, ComponentLink2URL=http://components.arrow.com/part/dataview/53771568S789882N1174?src-supplier=Arrow+Electronics, ComponentLink3Description=https://www.seielect.com/catalog/SEI-CF_CFM.pdf?src-supplier=Avnet, ComponentLink3URL=https://www.seielect.com/catalog/SEI-CF_CFM.pdf?src-supplier=Avnet, ComponentLink4Description=https://www.seielect.com/catalog/SEI-Packaging.pdf?src-supplier=Digikey, ComponentLink4URL=https://www.seielect.com/catalog/SEI-Packaging.pdf?src-supplier=Digikey, ComponentLink5Description=http://www.seielect.com/Catalog/SEI-CF_CFM.pdf?src-supplier=Future+Electronics, ComponentLink5URL=http://www.seielect.com/Catalog/SEI-CF_CFM.pdf?src-supplier=Future+Electronics, Construction=Tubular, JESD-609 Code=e3, Lead Diameter=0.55mm, Lead Length=28mm, Manufacturer Part Number=CF12JT47K0, Mounting Technology="Through Hole", Packaging="Tape and Reel", Pins=2, Pricing="1=0.1, 10=0.036, 25=0.0296, 50=0.026, 100=0.0229, 250=0.01936, 500=0.01718, 1000=0.01531 (USD)", Reach SVHC Compliant=Yes, RoHS=Yes, RoHS Compliant=Yes, Stock=190385, Supplier=Digikey, Technology="CARBON FILM", Terminal Finish=Tin, Termination=Wire
R3 R18: library part S4-220RF1, "RES SMD 220 OHM 1% 2W 4525", Manufacturer=Riedon, Supplier Part Number=696-S4-220RF1CT-ND, Category="Chip SMD Resistors", ComponentLink1Description=https://datasheet.ciiva.com/18599/ssl-18599814.pdf?src-supplier=Digikey, ComponentLink1URL=https://datasheet.ciiva.com/18599/ssl-18599814.pdf?src-supplier=Digikey, ComponentLink2Description=https://datasheet.ciiva.com/18599/ssl-18599815.pdf?src-supplier=Digikey, ComponentLink2URL=https://datasheet.ciiva.com/18599/ssl-18599815.pdf?src-supplier=Digikey, ComponentLink3Description=https://datasheet.ciiva.com/18599/ssl-18599816.pdf?src-supplier=Digikey, ComponentLink3URL=https://datasheet.ciiva.com/18599/ssl-18599816.pdf?src-supplier=Digikey, Manufacturer Part Number=S4-220RF1, Pricing="1=2.38, 10=1.582, 25=1.3652, 50=1.23, 100=1.1147, 250=0.98852, 500=0.90956 (USD)", RoHS=Yes, Stock=180, Supplier=Digikey
R4: library part CF1/4CT52R683J, "Fixed Resistor, Carbon Film, 0.25W, 68000ohm, 300V, 5% +/-Tol, -450,350ppm/Cel, Through Hole Mount", Manufacturer="KOA Speer", Max Operating Temperature=155°C, Min Operating Temperature=-55°C, Package Length=6.1mm, Package Shape=Tubular, Package Style=AXIAL, Power=250mW, Rated Temperature=70°C, Resistor Type="FIXED RESISTOR", Supplier Part Number=2019-CF1/4CT52R683JCT-ND, Temperature Coefficient (ppm/Cel)=450, Tolerance=5%, Working Voltage=300V, Category="Through-Hole Resistors", ComponentLink1Description=https://datasheet.ciiva.com:443/pdfs/VipMasterIC/IC/KOAS/KOAS-S-A0009586278/KOAS-S-A0009586278-1.pdf?src-supplier=IHS+Markit, ComponentLink1URL=https://datasheet.ciiva.com:443/pdfs/VipMasterIC/IC/KOAS/KOAS-S-A0009586278/KOAS-S-A0009586278-1.pdf?src-supplier=IHS+Markit, ComponentLink2Description=https://datasheet.ciiva.com/5478/cf-5478892.pdf?src-supplier=Mouser, ComponentLink2URL=https://datasheet.ciiva.com/5478/cf-5478892.pdf?src-supplier=Mouser, Construction=Cylindrical, JESD-609 Code=e2, Lead Diameter=0.6mm, Lead Length=14mm, Manufacturer Part Number=CF1/4CT52R683J, Mounting Technology="Through Hole", Packaging="Tape and Reel", Pins=2, Pricing="1=0.1, 10=0.046, 25=0.0384, 50=0.0336, 100=0.0296, 250=0.02512, 500=0.0223, 1000=0.01992 (USD)", Reach SVHC Compliant=Yes, Reference Standard=IEC60115-2, RoHS=Yes, RoHS Compliant=Yes, Stock=44894, Supplier=Digikey, Technology="CARBON FILM", Terminal Finish=Copper, Termination=Wire
R5 R7: library part CFM12JT15K0, "Fixed Resistor, Carbon Film, 0.5W, 15000ohm, 350V, 5% +/-Tol, -500,0ppm/Cel, Through Hole Mount", Manufacturer="Stackpole Electronics", Max Operating Temperature=155°C, Min Operating Temperature=-55°C, Package Length=6mm, Package Shape=Tubular, Package Style=AXIAL, Power=500mW, Rated Temperature=70°C, Resistor Type="FIXED RESISTOR", Supplier Part Number=S15KHCT-ND, Temperature Coefficient (ppm/Cel)=500, Tolerance=5%, Working Voltage=350V, Category="Through-Hole Resistors", ComponentLink1Description=https://datasheet.ciiva.com:443/pdfs/VipMasterIC/IC/SEIE/SEIE-S-A0009883960/SEIE-S-A0009883960-1.pdf?src-supplier=IHS+Markit, ComponentLink1URL=https://datasheet.ciiva.com:443/pdfs/VipMasterIC/IC/SEIE/SEIE-S-A0009883960/SEIE-S-A0009883960-1.pdf?src-supplier=IHS+Markit, ComponentLink2Description=https://www.seielect.com/catalog/SEI-Packaging.pdf?src-supplier=Digikey, ComponentLink2URL=https://www.seielect.com/catalog/SEI-Packaging.pdf?src-supplier=Digikey, ComponentLink3Description=https://www.seielect.com/catalog/sei-cf_cfm.pdf?src-supplier=Digikey, ComponentLink3URL=https://www.seielect.com/catalog/sei-cf_cfm.pdf?src-supplier=Digikey, ComponentLink4Description=https://www.seielect.com/catalog/SEI-CF_CFM.pdf?src-supplier=Avnet, ComponentLink4URL=https://www.seielect.com/catalog/SEI-CF_CFM.pdf?src-supplier=Avnet, Construction=Tubular, JESD-609 Code=e3, Lead Diameter=0.55mm, Lead Length=28mm, Manufacturer Part Number=CFM12JT15K0, Mounting Technology="Through Hole", Packaging="Tape and Reel", Pins=2, Pricing="1=0.1, 10=0.031, 25=0.0256, 50=0.0224, 100=0.0197, 250=0.01668, 500=0.01478, 1000=0.01316 (USD)", Reach SVHC Compliant=Yes, RoHS=Yes, RoHS Compliant=Yes, Stock=89193, Supplier=Digikey, Technology="CARBON FILM", Terminal Finish=Tin, Termination=Wire
R6 R8 R20: library part CF14JT1K00, "Fixed Resistor, Carbon Film, 0.25W, 1000ohm, 350V, 5% +/-Tol, -400,0ppm/Cel, Through Hole Mount", Manufacturer="Stackpole Electronics", Max Operating Temperature=155°C, Min Operating Temperature=-55°C, Package Length=6mm, Package Shape=Tubular, Package Style=AXIAL, Power=250mW, Rated Temperature=70°C, Resistor Type="FIXED RESISTOR", Supplier Part Number=CF14JT1K00CT-ND, Temperature Coefficient (ppm/Cel)=400, Tolerance=5%, Working Voltage=350V, Category="Through-Hole Resistors", ComponentLink1Description=https://datasheet.ciiva.com:443/pdfs/VipMasterIC/IC/SEIE/SEIE-S-A0009883960/SEIE-S-A0009883960-1.pdf?src-supplier=IHS+Markit, ComponentLink1URL=https://datasheet.ciiva.com:443/pdfs/VipMasterIC/IC/SEIE/SEIE-S-A0009883960/SEIE-S-A0009883960-1.pdf?src-supplier=IHS+Markit, ComponentLink2Description=https://www.seielect.com/catalog/SEI-Packaging.pdf?src-supplier=Digikey, ComponentLink2URL=https://www.seielect.com/catalog/SEI-Packaging.pdf?src-supplier=Digikey, ComponentLink3Description=https://www.seielect.com/Catalog/SEI-CF_CFM.pdf?src-supplier=Digikey, ComponentLink3URL=https://www.seielect.com/Catalog/SEI-CF_CFM.pdf?src-supplier=Digikey, ComponentLink4Description=https://www.seielect.com/catalog/SEI-CF_CFM.pdf?src-supplier=Avnet, ComponentLink4URL=https://www.seielect.com/catalog/SEI-CF_CFM.pdf?src-supplier=Avnet, ComponentLink5Description=http://components.arrow.com/part/dataview/27620077S9848643N1174?src-supplier=Arrow+Electronics, ComponentLink5URL=http://components.arrow.com/part/dataview/27620077S9848643N1174?src-supplier=Arrow+Electronics, ComponentLink6Description=http://www.seielect.com/Catalog/SEI-CF_CFM.pdf?src-supplier=Future+Electronics, ComponentLink6URL=http://www.seielect.com/Catalog/SEI-CF_CFM.pdf?src-supplier=Future+Electronics, ComponentLink7Description=https://datasheet.octopart.com/CF14JT1K00-Stackpole-Electronics-datasheet-8360004.pdf?src-supplier=Future+Electronics, ComponentLink7URL=https://datasheet.octopart.com/CF14JT1K00-Stackpole-Electronics-datasheet-8360004.pdf?src-supplier=Future+Electronics, ComponentLink8Description=https://www.verical.com/server-webapp/html/getDatasheet?partID=360403&src-supplier=Verical, ComponentLink8URL=https://www.verical.com/server-webapp/html/getDatasheet?partID=360403&src-supplier=Verical, ComponentLink9Description=https://datasheet.octopart.com/CF14JT1K00-Stackpole-Electronics-datasheet-32780772.pdf?src-supplier=Master+Electronics, ComponentLink9URL=https://datasheet.octopart.com/CF14JT1K00-Stackpole-Electronics-datasheet-32780772.pdf?src-supplier=Master+Electronics, Construction=Tubular, JESD-609 Code=e3, Lead Diameter=0.55mm, Lead Length=28mm, Manufacturer Part Number=CF14JT1K00, Mounting Technology="Through Hole", Packaging="Tape and Reel", Pins=2, Pricing="1=0.1, 10=0.026, 25=0.022, 50=0.0192, 100=0.0169, 250=0.01424, 500=0.0126, 1000=0.0112 (USD)", Reach SVHC Compliant=Yes, RoHS=Yes, RoHS Compliant=Yes, Stock=680385, Supplier=Digikey, Technology="CARBON FILM", Terminal Finish=Tin, Termination=Wire
R9 R13 R16: library part PDB12-H4251-104BF, "Potentiometer, Carbon, 0.08W, 100000ohm, 150V, 20% +/-Tol", Manufacturer=Bourns, Package Length=8.7mm, Power=80mW, Resistor Type=Potentiometer, Supplier Part Number=PDB12-H4251-104BF-ND, Tolerance=20%, Working Voltage=150V, Category="Variable Resistors and Potentiometers", ComponentLink1Description=https://datasheet.ciiva.com:443/pdfs/VipMasterIC/IC/BOUR/BOUR-S-A0002520119/BOUR-S-A0002520119-1.pdf?src-supplier=IHS+Markit, ComponentLink1URL=https://datasheet.ciiva.com:443/pdfs/VipMasterIC/IC/BOUR/BOUR-S-A0002520119/BOUR-S-A0002520119-1.pdf?src-supplier=IHS+Markit, ComponentLink2Description=https://datasheet.ciiva.com/4992/pdb12-27502-4992016.pdf?src-supplier=Mouser, ComponentLink2URL=https://datasheet.ciiva.com/4992/pdb12-27502-4992016.pdf?src-supplier=Mouser, ComponentLink3Description=https://datasheet.ciiva.com/6249/pdb12-6249578.pdf?src-supplier=Digikey, ComponentLink3URL=https://datasheet.ciiva.com/6249/pdb12-6249578.pdf?src-supplier=Digikey, ComponentLink4Description=https://datasheet.ciiva.com/8700/pdb12-8700988.pdf?src-supplier=Avnet, ComponentLink4URL=https://datasheet.ciiva.com/8700/pdb12-8700988.pdf?src-supplier=Avnet, Construction=Rotary, JESD-609 Code=e3, Manufacturer Part Number=PDB12-H4251-104BF, Pricing="1=1.11, 10=0.937, 25=0.8744, 50=0.83, 100=0.7875, 300=0.72413, 500=0.6963, 1000=0.66014, 2500=0.61504 (USD)", Reach SVHC Compliant=Yes, RoHS=Yes, RoHS Compliant=Yes, Rotational Angle=300°, Stock=619, Supplier=Digikey, Technology=CARBON, Terminal Finish=Tin
R10 R11 R12: library part PFS35-10KF1, "RES SMD 10K OHM 1% 35W TO263", Manufacturer=Riedon, Supplier Part Number=696-1275-1-ND, Category="Chip SMD Resistors", ComponentLink1Description=https://datasheet.ciiva.com/18597/pfs35-18597797.pdf?src-supplier=Digikey, ComponentLink1URL=https://datasheet.ciiva.com/18597/pfs35-18597797.pdf?src-supplier=Digikey, Manufacturer Part Number=PFS35-10KF1, Pricing="1=4.84, 10=4.01, 50=3.536, 100=3.362 (USD)", RoHS=Yes, Stock=1068, Supplier=Digikey
R14 R15: library part CF18JT4K70, "Fixed Resistor, Carbon Film, 0.125W, 4700ohm, 250V, 5% +/-Tol, -400,0ppm/Cel, Through Hole Mount", Manufacturer="Stackpole Electronics", Max Operating Temperature=155°C, Min Operating Temperature=-55°C, Package Length=3.3mm, Package Shape=Tubular, Package Style=AXIAL, Power=125mW, Rated Temperature=70°C, Resistor Type="FIXED RESISTOR", Supplier Part Number=CF18JT4K70CT-ND, Temperature Coefficient (ppm/Cel)=400, Tolerance=5%, Working Voltage=250V, Category="Through-Hole Resistors", ComponentLink1Description=https://datasheet.ciiva.com:443/pdfs/VipMasterIC/IC/SEIE/SEIE-S-A0009883960/SEIE-S-A0009883960-1.pdf?src-supplier=IHS+Markit, ComponentLink1URL=https://datasheet.ciiva.com:443/pdfs/VipMasterIC/IC/SEIE/SEIE-S-A0009883960/SEIE-S-A0009883960-1.pdf?src-supplier=IHS+Markit, ComponentLink2Description=https://datasheet.ciiva.com/15193/getdatasheetpartid-408268-15193341.pdf?src-supplier=Verical, ComponentLink2URL=https://datasheet.ciiva.com/15193/getdatasheetpartid-408268-15193341.pdf?src-supplier=Verical, Construction=Tubular, JESD-609 Code=e3, Lead Diameter=0.4mm, Lead Length=28mm, Manufacturer Part Number=CF18JT4K70, Mounting Technology="Through Hole", Packaging="Tape and Reel", Pins=2, Pricing="1=0.1, 10=0.022, 25=0.0188, 50=0.0162, 100=0.0143, 250=0.01204, 500=0.01062, 1000=0.00943 (USD)", Reach SVHC Compliant=Yes, RoHS=Yes, RoHS Compliant=Yes, Stock=179076, Supplier=Digikey, Technology="CARBON FILM", Terminal Finish=Tin, Termination=Wire
R17: library part CF14JT1M00, "Fixed Resistor, Carbon Film, 0.25W, 1000000ohm, 350V, 5% +/-Tol, -1500,0ppm/Cel, Through Hole Mount", Manufacturer="Stackpole Electronics", Max Operating Temperature=155°C, Min Operating Temperature=-55°C, Package Length=6mm, Package Shape=Tubular, Package Style=AXIAL, Power=250mW, Rated Temperature=70°C, Resistor Type="FIXED RESISTOR", Supplier Part Number=CF14JT1M00CT-ND, Temperature Coefficient (ppm/Cel)=1500, Tolerance=5%, Working Voltage=350V, Category="Through-Hole Resistors", ComponentLink1Description=https://datasheet.ciiva.com:443/pdfs/VipMasterIC/IC/SEIE/SEIE-S-A0009883960/SEIE-S-A0009883960-1.pdf?src-supplier=IHS+Markit, ComponentLink1URL=https://datasheet.ciiva.com:443/pdfs/VipMasterIC/IC/SEIE/SEIE-S-A0009883960/SEIE-S-A0009883960-1.pdf?src-supplier=IHS+Markit, ComponentLink2Description=https://datasheet.ciiva.com/15193/getdatasheetpartid-359898-15193308.pdf?src-supplier=Verical, ComponentLink2URL=https://datasheet.ciiva.com/15193/getdatasheetpartid-359898-15193308.pdf?src-supplier=Verical, Construction=Tubular, JESD-609 Code=e3, Lead Diameter=0.55mm, Lead Length=28mm, Manufacturer Part Number=CF14JT1M00, Mounting Technology="Through Hole", Packaging="Tape and Reel", Pins=2, Pricing="1=0.1, 10=0.026, 25=0.022, 50=0.0192, 100=0.0169, 250=0.01424, 500=0.0126, 1000=0.0112 (USD)", Reach SVHC Compliant=Yes, RoHS=Yes, RoHS Compliant=Yes, Stock=240510, Supplier=Digikey, Technology="CARBON FILM", Terminal Finish=Tin, Termination=Wire
R21: library part OY222KE, "Fixed Resistor, Ceramic Composition, 2W, 2200ohm, 400V, 10% +/-Tol, 1600ppm/Cel, Through Hole Mount", Manufacturer=Ohmite, Max Operating Temperature=220°C, Min Operating Temperature=-40°C, Package Length=19mm, Package Shape=Tubular, Package Style=AXIAL, Power=2W, Rated Temperature=70°C, Resistor Type="FIXED RESISTOR", Supplier Part Number=OY222KE-ND, Temperature Coefficient (ppm/Cel)=1600, Tolerance=10%, Working Voltage=400V, Category="Through-Hole Resistors", ComponentLink1Description=https://datasheet.ciiva.com:443/pdfs/VipMasterIC/IC/OMIT/OMITS00880/OMITS00880-1.pdf?src-supplier=IHS+Markit, ComponentLink1URL=https://datasheet.ciiva.com:443/pdfs/VipMasterIC/IC/OMIT/OMITS00880/OMITS00880-1.pdf?src-supplier=IHS+Markit, ComponentLink2Description=https://datasheet.ciiva.com/2716/res-ox-oy-2716360.pdf?src-supplier=Digikey, ComponentLink2URL=https://datasheet.ciiva.com/2716/res-ox-oy-2716360.pdf?src-supplier=Digikey, ComponentLink3Description=https://datasheet.ciiva.com/16723/70022171-16723470.pdf?src-supplier=Allied+Electronics, ComponentLink3URL=https://datasheet.ciiva.com/16723/70022171-16723470.pdf?src-supplier=Allied+Electronics, ComponentLink4Description=https://datasheet.ciiva.com/15784/ox-oy-series-15784138.pdf?src-supplier=Onlinecomponents.com, ComponentLink4URL=https://datasheet.ciiva.com/15784/ox-oy-series-15784138.pdf?src-supplier=Onlinecomponents.com, ComponentLink5Description=https://datasheet.ciiva.com/15199/getdatasheetpartid-693640-15199061.pdf?src-supplier=Verical, ComponentLink5URL=https://datasheet.ciiva.com/15199/getdatasheetpartid-693640-15199061.pdf?src-supplier=Verical, ComponentLink6Description=https://datasheet.ciiva.com/7715/95960-7715879.pdf?src-supplier=Element14, ComponentLink6URL=https://datasheet.ciiva.com/7715/95960-7715879.pdf?src-supplier=Element14, Construction=Cylindrical, JESD-609 Code=e2, Lead Diameter=0.8mm, Lead Length=38mm, Manufacturer Part Number=OY222KE, Mounting Technology="Through Hole", Packaging="Tape and Reel", Pins=2, Pricing="1=3.52, 10=2.365, 25=2.0516, 50=1.8554, 100=1.6884, 250=1.50564, 500=1.39132, 1000=1.29418, 5000=1.12139 (USD)", Reach SVHC Compliant=Yes, RoHS=Yes, RoHS Compliant=Yes, Series=OY, Stock=1622, Supplier=Digikey, Technology="CERAMIC COMPOSITION", Terminal Finish=Copper, Termination=Wire
R23: library part ROX1SJ39R, "Fixed Resistor, Metal Oxide Film, 1W, 39ohm, 350V, 5% +/-Tol, 350ppm/Cel, Through Hole Mount", Manufacturer="TE Connectivity", Manufacturer Series=ROX, Max Operating Temperature=235°C, Min Operating Temperature=-55°C, Package Length=10mm, Package Shape=Tubular, Package Style=AXIAL, Power=1W, Rated Temperature=70°C, Resistor Type="FIXED RESISTOR", Supplier Part Number=A131465CT-ND, Temperature Coefficient (ppm/Cel)=300, Tolerance=5%, Working Voltage=350V, Category="Through-Hole Resistors", ComponentLink1Description=https://datasheet.ciiva.com:443/pdfs/VipMasterIC/IC/TYEL/TYEL-S-A0009531935/TYEL-S-A0009530835-1.pdf?src-supplier=IHS+Markit, ComponentLink1URL=https://datasheet.ciiva.com:443/pdfs/VipMasterIC/IC/TYEL/TYEL-S-A0009531935/TYEL-S-A0009530835-1.pdf?src-supplier=IHS+Markit, ComponentLink2Description=https://datasheet.ciiva.com/11823/0900766b800275a1-11823946.pdf?src-supplier=Rs, ComponentLink2URL=https://datasheet.ciiva.com/11823/0900766b800275a1-11823946.pdf?src-supplier=Rs, ComponentLink3Description=https://datasheet.ciiva.com/2726/eng-ds-1773271-e-2726594.pdf?src-supplier=Digikey, ComponentLink3URL=https://datasheet.ciiva.com/2726/eng-ds-1773271-e-2726594.pdf?src-supplier=Digikey, ComponentLink4Description=https://datasheet.ciiva.com/16756/70063511-16756136.pdf?src-supplier=Allied+Electronics, ComponentLink4URL=https://datasheet.ciiva.com/16756/70063511-16756136.pdf?src-supplier=Allied+Electronics, Construction=Flameproof, Lead Diameter=0.54mm, Manufacturer Part Number=ROX1SJ39R, Mounting Technology="Through Hole", Packaging="Ammo Pack", Pins=2, Pricing="1=0.1, 10=0.075, 50=0.066, 100=0.0622, 500=0.05628 (USD)", Reach SVHC Compliant=Yes, RoHS=Yes, RoHS Compliant=Yes, Series=ROX, Stock=162196, Supplier=Digikey, Technology="METAL OXIDE FILM", Termination=Wire